# EAGLE board SMD_Breakout_LargeHeader (EAGLE 7.2.0)
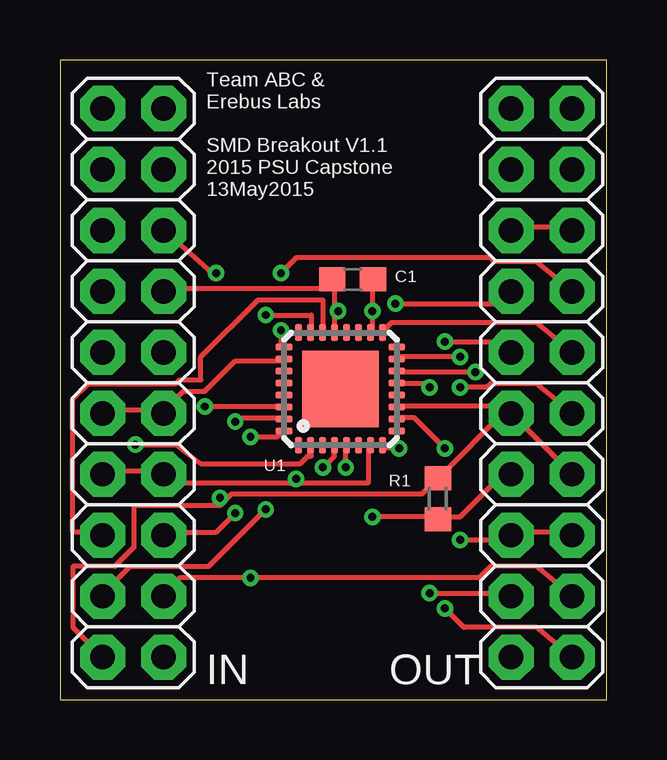
[diagram p0: board, top side]
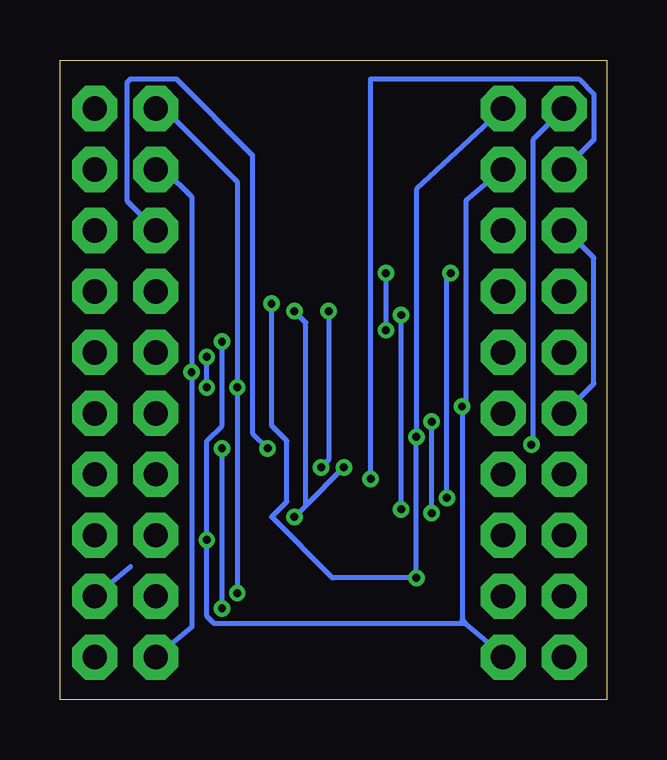
[diagram p1: board, bottom side, seen from below]

Size 22.78 x 26.66 mm. Coordinates in mm from the lower left corner, seen from the top.
Outline: 0,0 22.78,0 22.78,26.66 0,26.66 0,0
Copper layers (1*16): Top 0.0356mm / dielectric 1.5011mm / Bottom 0.0356mm
Design rules "LaenPCBOrder": minimum track width 6mil, minimum drill 13mil, track to track 6mil, track to pad 6mil, pad to pad 6mil, via to via 6mil, smd to smd 6mil, copper to edge 15mil, drill to drill 6mil, minimum pad ring 7mil, minimum via ring 7mil, stop-mask expansion 3mil, vias tented up to drill 0mil, thermal gap 10mil

## Footprints (pad centres in the part's own frame; a part is rotated, then mirrored left to right if it is on the bottom)
C0603 = smd 1.1 x 1: 1 -0.85,0; 2 0.85,0
2X10 = drill 1.016 pad 1.88 octagon: 1 -11.43,-1.27; 2 -11.43,1.27; 3 -8.89,-1.27; 4 -8.89,1.27; 5 -6.35,-1.27; 6 -6.35,1.27; 7 -3.81,-1.27; 8 -3.81,1.27; 9 -1.27,-1.27; 10 -1.27,1.27; 11 1.27,-1.27; 12 1.27,1.27; 13 3.81,-1.27; 14 3.81,1.27; 15 6.35,-1.27; 16 6.35,1.27; 17 8.89,-1.27; 18 8.89,1.27; 19 11.43,-1.27; 20 11.43,1.27
R0603 = smd 1 x 1.1: 1 -0.85,0; 2 0.85,0
MLF32-TH = smd 0.7 x 0.3: 1 -2.35,1.75; 2 -2.35,1.25; 3 -2.35,0.75; 4 -2.35,0.25; 5 -2.35,-0.25; 6 -2.35,-0.75; 7 -2.35,-1.25; 8 -2.35,-1.75; 17 2.35,-1.75; 18 2.35,-1.25; 19 2.35,-0.75; 20 2.35,-0.25; 21 2.35,0.25; 22 2.35,0.75; 23 2.35,1.25; 24 2.35,1.75 | smd 0.3 x 0.7: 9 -1.75,-2.35; 10 -1.25,-2.35; 11 -0.75,-2.35; 12 -0.25,-2.35; 13 0.25,-2.35; 14 0.75,-2.35; 15 1.25,-2.35; 16 1.75,-2.35; 25 1.75,2.35; 26 1.25,2.35; 27 0.75,2.35; 28 0.25,2.35; 29 -0.25,2.35; 30 -0.75,2.35; 31 -1.25,2.35; 32 -1.75,2.35 | smd 3.2 x 3.2: TH 0,0

## Placement (x,y rotation side)
C1  [C0603]  12.19,17.53 180 top
IN  [2X10]  3.05,13.21 90 top
OUT  [2X10]  20.07,13.21 90 top
R1  [R0603]  15.75,8.38 90 top
U1  ATTINY461A-SUMLF-32-TH  [MLF32-TH]  11.68,12.95 90 top

## Library data of the parts
C1 R1 = rcl
IN OUT = SparkFun-Connectors
U1 = Atmel_By_element14_Batch_1-00

## Nets
ABOVE: OUT.1 U1.10
BELOW: IN.20 U1.2
ELED: OUT.9 U1.15
GND: C1.2 IN.13 U1.5 U1.21
LEFT: IN.5 U1.31
M_CLK: OUT.2 OUT.18 U1.14
MDO: OUT.4 OUT.20 U1.13
PA2: IN.4 U1.23
PA3: IN.6 U1.22
POT: OUT.13 U1.25
RESET: IN.2 IN.15 OUT.7 OUT.10 R1.2 U1.11
RIGHT: OUT.15 OUT.16 U1.8
S_CLK: IN.7 IN.8 IN.18 U1.7
SCL: IN.3 IN.19 OUT.3 OUT.14 U1.32
SDA: IN.1 IN.17 OUT.5 OUT.6 OUT.12 U1.30
SDI: IN.9 IN.10 IN.16 U1.26
SLED: OUT.11 U1.17
VDD: C1.1 OUT.8 R1.1 U1.4 U1.18

## Tracks (layer width: path | path; a pad name or v marks a point on that pad's centre or on a via)
ABOVE  (via drill 0.33)
  Top 0.203: v16.03,10.48 14.76,11.75 14.13,11.75 U1.10 | v16.03,3.81 16.83,3.02 19.84,3.02 OUT.1
  Bottom 0.203: v16.03,3.81 v16.03,10.48
BELOW  (via drill 0.33)
  Top 0.203: v3.14,10.64 4.83,10.64 5.87,9.84 10,9.84 10.32,10.16 10.48,10.16 10.48,10.48 U1.2
  Bottom 0.203: v3.14,10.64 3.08,10.95 3.08,23.34 IN.20
ELED  (via drill 0.33)
  Top 0.203: v16.67,14.29 14.13,14.29 U1.15 | v16.67,13.02 17.78,13.02 17.94,13.18 19.84,13.18 OUT.9
  Bottom 0.203: v16.67,13.02 v16.67,14.29
GND  (via drill 0.33)
  Top 0.203: 11.43,16.19 11.43,17.46 C1.2 11.27,17.46 10.95,17.14 4.35,17.14 IN.13 | 11.43,16.19 11.43,15.4 U1.21 | v11.91,9.68 11.91,10.48 U1.5 | 11.43,16.19 v11.59,16.19
  Bottom 0.203: v11.91,9.68 11.59,10 v11.59,16.19
LEFT  (via drill 0.33)
  Top 0.203: v7.3,11.59 7.46,11.75 9.21,11.75 U1.31 | v7.3,7.78 6.51,6.99 4.35,6.99 IN.5
  Bottom 0.203: v7.3,7.78 v7.3,11.59
M_CLK  (via drill 0.33)
  Top 0.203: v17.3,13.65 14.13,13.65 U1.14
  Bottom 0.203: OUT.18 18.41,22.07 17.3,20.95 v17.3,13.65 17.3,3.02 OUT.2
MDO  (via drill 0.33)
  Top 0.203: v15.4,13.02 15.24,13.18 14.13,13.18 U1.13 | v15.4,4.45 18.41,4.45 OUT.4
  Bottom 0.203: OUT.20 18.41,24.61 15.4,21.59 v15.4,13.02 v15.4,4.45
PA2  (via drill 0.33)
  Top 0.203: v8.57,16.03 10.48,16.03 10.48,15.4 U1.23 | v8.57,7.94 6.19,5.56 2.92,5.56 1.81,4.45 IN.4
  Bottom 0.203: v8.57,7.94 v8.57,16.03
PA3
  Top 0.203: U1.22 10.95,15.4 10.95,16.67 8.26,16.67 5.87,14.29 5.87,13.34 4.99,13.34 4.83,13.18 1.18,13.18 0.54,12.54 0.54,6.99 1.65,6.99 IN.6
POT  (via drill 0.33)
  Top 0.203: v9.21,15.4 9.21,14.76 U1.25 | v9.21,17.78 9.84,18.41 17.94,18.41 18.1,18.26 19.84,18.26 OUT.13
  Bottom 0.203: v9.21,17.78 v9.21,15.4
RESET  (via drill 0.33)
  Top 0.203: OUT.10 18.26,12.22 14.13,12.22 U1.11 | OUT.10 18.41,11.91 15.88,9.37 R1.2 15.72,9.21 15.08,8.57 7.14,8.57 6.83,8.26 | IN.2 0.54,3.02 0.54,5.56 2.29,5.56 3.08,6.35 3.08,8.1 6.67,8.1 6.83,8.26 | IN.15 6.35,17.78 v6.51,17.78 | 6.83,8.26 v6.67,8.41 | OUT.10 OUT.7
  Bottom 0.203: v6.51,17.78 6.67,17.62 v6.67,8.41
RIGHT  (via drill 0.33)
  Top 0.203: v14.13,10.48 13.49,10.48 U1.8 | OUT.16 18.89,19.68 21.27,19.68 OUT.15
  Bottom 0.203: v14.13,10.48 14.76,11.11 14.76,22.7 17.94,25.88 19.84,25.88 20,25.72 20,20.8 18.89,19.68 OUT.16 18.57,19.68
S_CLK  (via drill 0.33)
  Top 0.203: 9.84,9.05 4.67,9.05 IN.7 4.19,9.53 1.81,9.53 IN.8 | 9.84,9.05 12.86,9.05 12.86,10.48 U1.7 | 9.84,9.05 v9.84,9.21
  Bottom 0.203: IN.18 0.54,23.34 0.54,25.24 1.18,25.88 9.84,25.88 v9.84,9.21
SCL  (via drill 0.33)
  Top 0.203: v7.94,10.95 9.05,10.95 9.21,11.11 U1.32 | OUT.3 19.84,5.56 17.94,5.56 17.46,5.08 v7.94,5.08 4.99,5.08 4.35,4.45 IN.3 | v13.97,16.51 18.41,16.51 OUT.14
  Bottom 0.203: IN.19 7.94,21.27 v7.94,10.95 v7.94,5.08 11.43,5.08 13.97,7.62 13.34,8.26 13.34,10.79 13.97,11.43 v13.97,16.51 | OUT.3 19.84,5.56
SDA  (via drill 0.33)
  Top 0.203: OUT.5 20.95,6.99 18.57,6.99 OUT.6 18.41,6.83 18.26,6.67 v16.67,6.67 | v6.03,12.22 9.21,12.22 U1.30 | OUT.12 18.1,14.92 v16.03,14.92
  Bottom 0.203: IN.17 5.87,20.8 5.87,12.38 v6.03,12.22 6.03,3.33 5.87,3.17 | 5.87,3.17 4.35,1.91 IN.1 | v16.03,14.92 16.03,11.43 16.67,10.79 v16.67,6.67 16.67,3.49 16.35,3.17 5.87,3.17
SDI
  Top 0.203: U1.26 9.21,14.13 7.3,14.13 6.03,12.86 5.14,12.86 4.35,12.06 IN.9 4.19,12.06 1.81,12.06 IN.10
  Bottom 0.203: IN.10 0.54,13.18 0.54,18.41 1.65,19.53 IN.16
SLED
  Top 0.203: OUT.11 19.84,15.72 13.81,15.72 13.49,15.4 U1.17
VDD  (via drill 0.33)
  Top 0.203: U1.18 13.02,15.4 v13.02,16.19 13.02,17.46 C1.1 | v10.95,9.68 11.43,10.16 11.43,10.48 U1.4 | v13.02,7.62 15.72,7.62 R1.1 15.88,7.62 16.67,7.62 18.41,9.37 OUT.8
  Bottom 0.203: v13.02,7.62 12.54,8.1 | 12.54,8.1 v10.95,9.68 | v13.02,16.19 12.54,15.72 12.54,8.1

## Text on the board
tNames: Team ABC & / Erebus Labs / / SMD Breakout V1.1 / 2015 PSU Capstone / 13May2015